# EAGLE board PCB-TCH-CON (EAGLE 6.5.0)
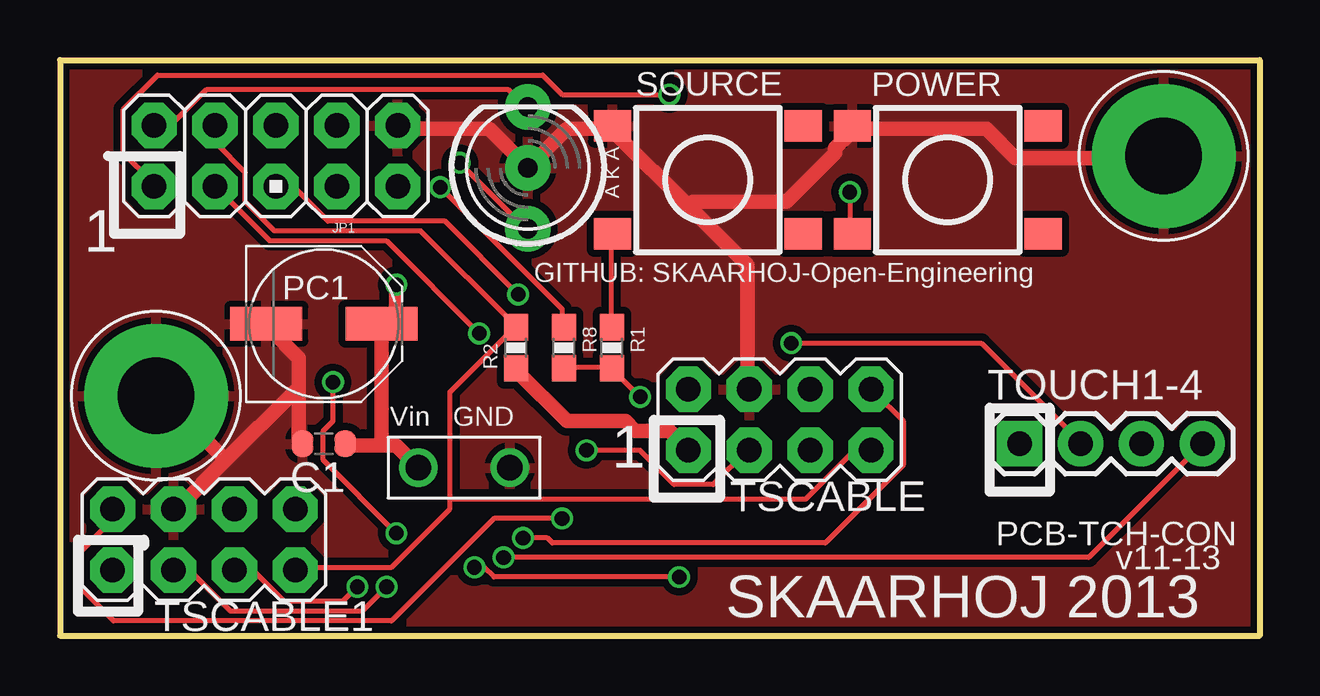
[diagram p0: board, top side]
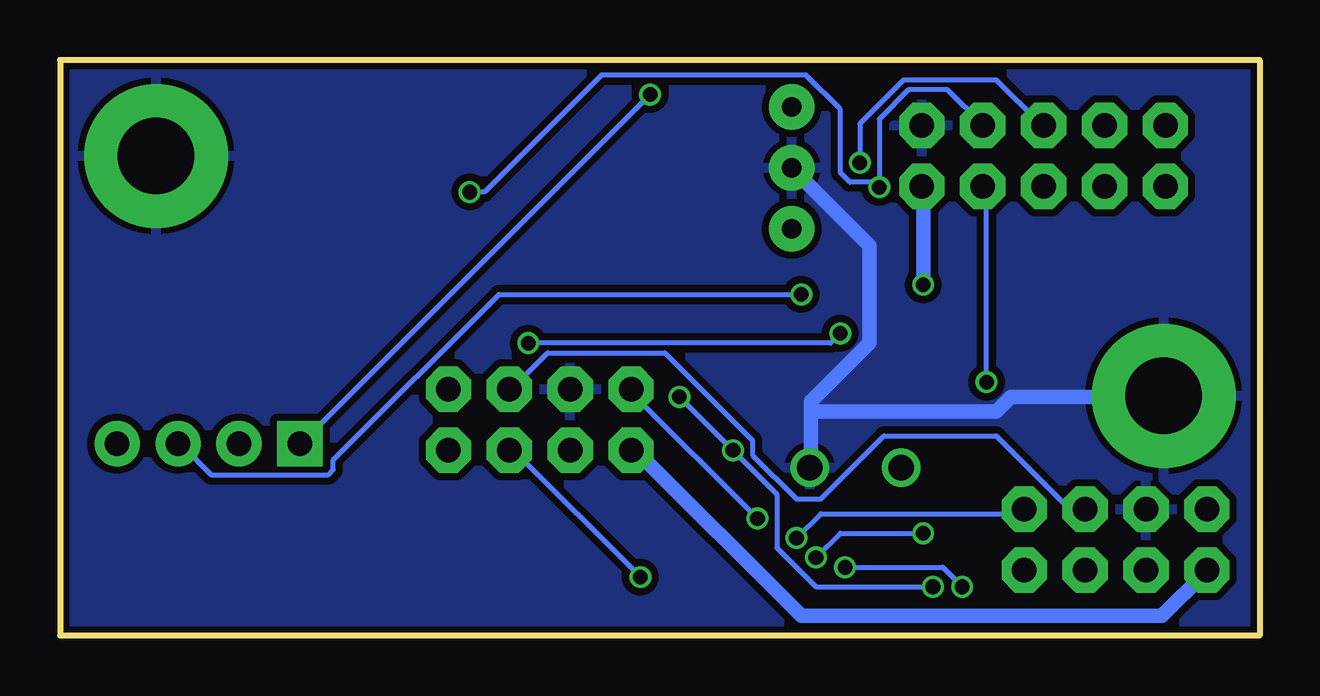
[diagram p1: board, bottom side, seen from below]

Size 50 x 24 mm. Coordinates in mm from the lower left corner, seen from the top.
Outline: 0,24 50,24 50,0 0,0 0,24
Copper layers (1*16): Top 0.035mm / dielectric 1.5mm / Bottom 0.035mm
Design rules "Fusion_eagle_rule_v1.1": minimum track width 6mil, minimum drill 12mil, track to track 6mil, track to pad 6mil, pad to pad 6mil, via to via 6mil, smd to smd 0mil, copper to edge 10mil, drill to drill 10mil, minimum pad ring 10mil, minimum via ring 6mil, stop-mask expansion 2mil, vias tented up to drill 100mil, thermal gap 10mil
Net classes: 0 default: width 0.203 mm, drill 0.61 mm, clearance 0.203 mm; 1 Power: width 0.61 mm, drill 0.61 mm, clearance 0.305 mm

## Footprints (pad centres in the part's own frame; a part is rotated, then mirrored left to right if it is on the bottom)
C0603-ROUND = smd 0.898 x 1.1: 1 -0.889,0; 2 0.889,0
AVR_ICSP = drill 1.016 pad 1.88 octagon: 1 -1.27,5.08; 2 1.27,5.08; 3 -1.27,2.54; 4 1.27,2.54; 5 -1.27,0; 6 1.27,0; 7 -1.27,-2.54; 8 1.27,-2.54; 9 -1.27,-5.08; 10 1.27,-5.08
TACTILE_SWITCH_TALL = smd 1.55 x 1.3: A1 -3.975,-2.25; A2 3.975,-2.25; B1 -3.975,2.25; B2 3.975,2.25
PANASONIC_D = smd 3 x 1.4: + 2.4,0; - -2.4,0
0603-RES = smd 1.1 x 1: 1 -0.85,0; 2 0.85,0
1X04 = drill 1.016 pad 1.88 square: 1 0,0 | drill 1.016 pad 1.88: 2 2.54,0; 3 5.08,0; 4 7.62,0
2X4 = drill 1.016 pad 1.88 octagon: 1 -3.81,-1.27; 2 -3.81,1.27; 3 -1.27,-1.27; 4 -1.27,1.27; 5 1.27,-1.27; 6 1.27,1.27; 7 3.81,-1.27; 8 3.81,1.27
LED5MM-BICOLOR = drill 0.813 pad 1.88: A2 2.54,0; A3 -2.54,0; K1 0,0
3.2MMPAD6MM = drill 3.2 pad 6: P$1 0,0
1X02_BIG = drill 1.067: P$1 0,0; P$2 3.81,0

## Placement (x,y rotation side)
C1  100n  [C0603-ROUND]  11,8 180 top
JP1  M05X2PTH  [AVR_ICSP]  9,20 90 top
ON  SWITCH-MOMENTARY-2  [TACTILE_SWITCH_TALL]  37,19 180 top
PC1  47u  [PANASONIC_D]  11,13 0 top
R1  100R  [0603-RES]  23,12 270 top
R2  1K  [0603-RES]  19,12 90 top
R8  15K  [0603-RES]  21,12 270 top
SRC  SWITCH-MOMENTARY-2  [TACTILE_SWITCH_TALL]  27,19 180 top
TOUCH1-4  [1X04]  40,8 0 top
TSCABLE  M04X2  [2X4]  30,9 0 top
TSCABLE1  M04X2  [2X4]  6,4 0 top
U$2  LEDBICOLOR-AKA  [LED5MM-BICOLOR]  19.5,19.5 90 top
U$15  GNDPAD6MM  [3.2MMPAD6MM]  4,10 0 top
U$20  GNDPAD6MM  [3.2MMPAD6MM]  46,20 0 top
VIN1  [1X02_BIG]  18.75,7 180 top

## Library data of the parts
C1 = SmartPrj
JP1 ON R1 R2 R8 SRC TOUCH1-4 TSCABLE TSCABLE1 VIN1 = SparkFun
PC1 = rcl
U$2 U$15 U$20 = SKAARHOJ

## Nets
5V [Power]: R2.1 TSCABLE1.1 TSCABLE.1
A0: JP1.1 TOUCH1-4.1
A1: JP1.3 TOUCH1-4.2
A2: JP1.5 TOUCH1-4.3
A3: JP1.7 TOUCH1-4.4
GND [Power]: C1.2 JP1.10 ON.A2 PC1.- SRC.A2 TSCABLE1.4 TSCABLE.4 U$2.K1 U$15.P$1 U$20.P$1 VIN1.P$1
IR: TSCABLE1.2 TSCABLE.2
KEYIN: R1.2 R8.2 TSCABLE1.3 TSCABLE.3
LEDPWR: TSCABLE1.5 TSCABLE.5
N$1: JP1.2 U$2.A2
N$2: JP1.6 U$2.A3
N$4: TSCABLE1.8 TSCABLE.8
N$6: R1.1 SRC.B2
N$11: JP1.8 ON.B2 R8.1
PWRLED1: TSCABLE1.6 TSCABLE.6
PWRLED2: JP1.4 R2.2 TSCABLE1.7 TSCABLE.7
VIN [Power]: C1.1 JP1.9 PC1.+ VIN1.P$2

## Tracks (layer width: path | path; a pad name or v marks a point on that pad's centre or on a via)
5V
  Top 0.61: R2.1 19.1,10.97 21.13,8.94 23.57,8.94 23.98,8.53 25.4,8.53 26.01,7.92 TSCABLE.1
  Bottom 0.61: TSCABLE1.1 2.23,2.64 4.06,0.81 19.1,0.81 26.01,7.72 TSCABLE.1
A0  (via drill 0.61)
  Top 0.203: v25.4,22.55 20.93,22.55 20.12,23.37 4.06,23.37 2.64,21.95 2.64,20.12 3.86,18.9 JP1.1
  Bottom 0.203: v25.4,22.55 39.83,8.13 TOUCH1-4.1
A1  (via drill 0.61)
  Top 0.203: v30.48,12.19 38.41,12.19 42.47,8.13 TOUCH1-4.2 | v17.48,12.6 13.61,16.46 8.74,16.46 6.5,18.69 JP1.3
  Bottom 0.203: v30.48,12.19 17.88,12.19 v17.48,12.6
A2  (via drill 0.61)
  Top 0.203: v19.1,14.22 16.05,17.27 11.18,17.27 9.75,18.69 9.14,18.69 JP1.5
  Bottom 0.203: v19.1,14.22 31.7,14.22 38.61,7.32 38.61,6.91 38.81,6.71 43.69,6.71 44.91,7.92 TOUCH1-4.3
A3  (via drill 0.61)
  Top 0.203: v11.38,10.57 11.38,8.94 10.97,8.53 10.97,7.32 v14.02,4.27 | v18.49,3.25 42.88,3.25 47.55,7.92 TOUCH1-4.4
  Bottom 0.203: v11.38,10.57 11.38,18.69 JP1.7 | v14.02,4.27 17.48,4.27 v18.49,3.25
GND
  Top 0.61: U$20.P$1 45.92,19.91 39.83,19.91 38.61,21.13 33.12,21.13 ON.A2 32.92,20.93 32.31,20.32 32.31,20.12 30.28,18.09 26.42,18.09 26.21,17.88 | 9.96,10.16 9.96,11.58 8.74,12.8 PC1.- | 9.96,10.16 9.96,8.13 C1.2 | 6.91,7.32 9.75,10.16 9.96,10.16 | 6.91,7.32 4.88,5.28 TSCABLE1.4 | 6.91,7.32 4.06,10.16 U$15.P$1 | JP1.10 14.22,21.13 17.88,21.13 19.3,19.71 U$2.K1 21.13,21.13 22.96,21.13 SRC.A2 23.16,20.93 26.21,17.88 | 26.21,17.88 28.65,15.44 28.65,10.36 TSCABLE.4
  Bottom 0.61: 18.69,9.35 18.69,9.75 16.26,12.19 16.26,16.26 U$2.K1 | 18.69,9.35 18.69,7.11 VIN1.P$1 | 18.69,9.35 10.97,9.35 10.36,9.96 4.06,9.96 U$15.P$1
  pour Top: 0,0 50,0 50,24 0,24
  pour Bottom: 0,0 50,0 50,24 0,24
IR  (via drill 0.61)
  Top 0.203: v20.93,4.88 18.09,4.88 13.82,0.61 2.23,0.61 0.81,2.03 0.81,3.45 2.03,4.67 2.03,5.08 TSCABLE1.2
  Bottom 0.203: v20.93,4.88 26.21,10.16 TSCABLE.2
KEYIN  (via drill 0.61)
  Top 0.203: R8.2 21.13,11.18 22.96,11.18 R1.2 23.16,10.97 v24.18,9.96 | v21.95,7.72 24.18,7.72 25.6,6.3 27.23,6.3 28.65,7.72 TSCABLE.3 | v13.61,2.03 12.6,1.02 7.11,1.02 5.49,2.64 4.88,2.64 TSCABLE1.3
  Bottom 0.203: v24.18,9.96 v21.95,7.72 20.12,5.89 20.12,3.66 18.49,2.03 v13.61,2.03
LEDPWR  (via drill 0.61)
  Top 0.203: v12.39,2.03 11.79,1.42 9.35,1.42 8.13,2.64 7.32,2.64 TSCABLE1.5 | v17.27,2.85 17.68,2.85 18.09,2.44 v25.81,2.44
  Bottom 0.203: v12.39,2.03 13.21,2.85 v17.27,2.85 | v25.81,2.44 31.09,7.72 TSCABLE.5
N$1
  Top 0.203: JP1.2 4.06,21.34 4.67,21.34 6.1,22.76 18.69,22.76 19.3,22.15 U$2.A2
N$2  (via drill 0.61)
  Top 0.203: v16.66,19.71 19.3,17.07 U$2.A3
  Bottom 0.203: v16.66,19.71 16.66,21.34 14.83,23.16 10.97,23.16 9.14,21.34 JP1.6
N$4  (via drill 0.61)
  Top 0.203: v19.3,4.06 20.32,4.06 20.52,3.86 31.9,3.86 35.15,7.11 35.15,8.94 33.93,10.16 TSCABLE.8
  Bottom 0.203: v19.3,4.06 18.29,5.08 9.96,5.08 TSCABLE1.8
N$6
  Top 0.203: R1.1 22.96,13.01 22.96,16.66 SRC.B2
N$11  (via drill 0.61)
  Top 0.203: v15.85,18.69 20.93,13.61 20.93,13.01 R8.1 | v32.92,18.49 32.92,16.87 ON.B2
  Bottom 0.203: 15.85,18.9 15.85,21.54 14.63,22.76 13.01,22.76 11.58,21.34 JP1.8 | v32.92,18.49 32.31,18.49 27.43,23.37 18.9,23.37 17.48,21.95 17.48,19.3 17.07,18.9 15.85,18.9 | 15.85,18.9 v15.85,18.69
PWRLED1
  Bottom 0.203: TSCABLE1.6 7.32,5.28 7.92,5.28 10.97,8.33 15.65,8.33 18.29,5.69 19.3,5.69 21.13,7.52 21.13,8.13 24.79,11.79 29.67,11.79 31.09,10.36 TSCABLE.6
PWRLED2
  Top 0.203: 16.26,5.69 16.26,5.28 13.82,2.85 9.96,2.85 TSCABLE1.7 | 16.26,5.69 16.26,10.16 18.9,12.8 R2.2 18.9,13.01 15.04,16.87 8.94,16.87 7.72,18.09 7.72,19.3 6.5,20.52 6.5,21.13 JP1.4 | 16.26,5.69 31.09,5.69 33.12,7.72 33.73,7.72 TSCABLE.7
VIN  (via drill 0.61)
  Top 0.61: 13.41,7.92 14.02,7.92 14.83,7.11 VIN1.P$2 | 13.41,7.92 11.99,7.92 C1.1 | 13.41,7.92 13.41,12.8 PC1.+ 13.61,13.21 14.02,13.61 v14.02,14.63
  Bottom 0.61: v14.02,14.63 14.02,18.69 JP1.9

## Text on the board
_tsilk: POWER | SOURCE | 1 | GITHUB: SKAARHOJ-Open-Engineering | Vin GND | 1 | PCB-TCH-CON | v11-13 | SKAARHOJ 2013